# EAGLE board pcb1a (EAGLE 9.6.2)
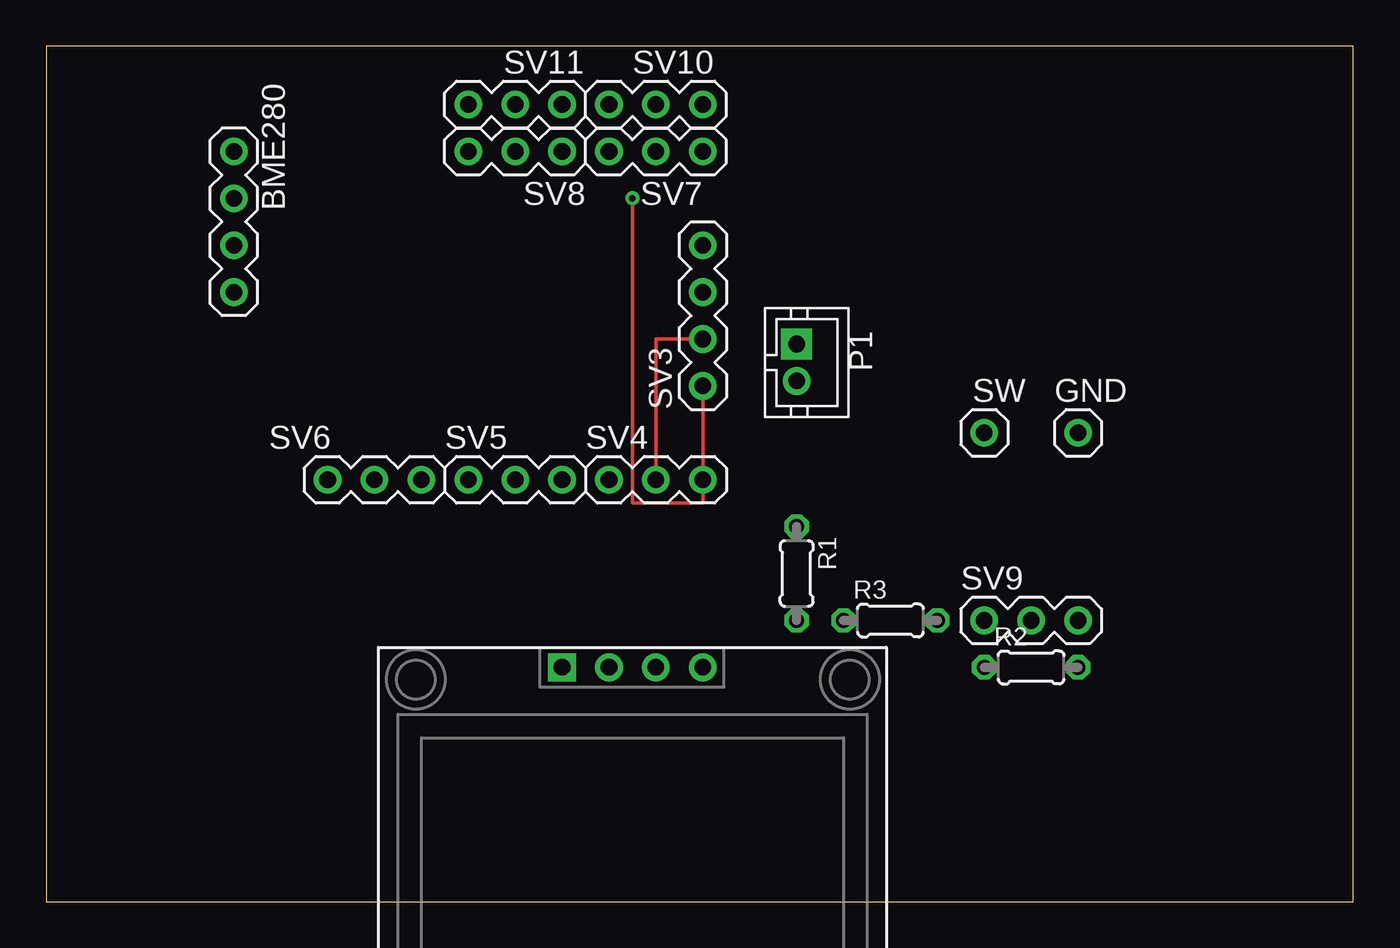
[diagram p0: board, top side]
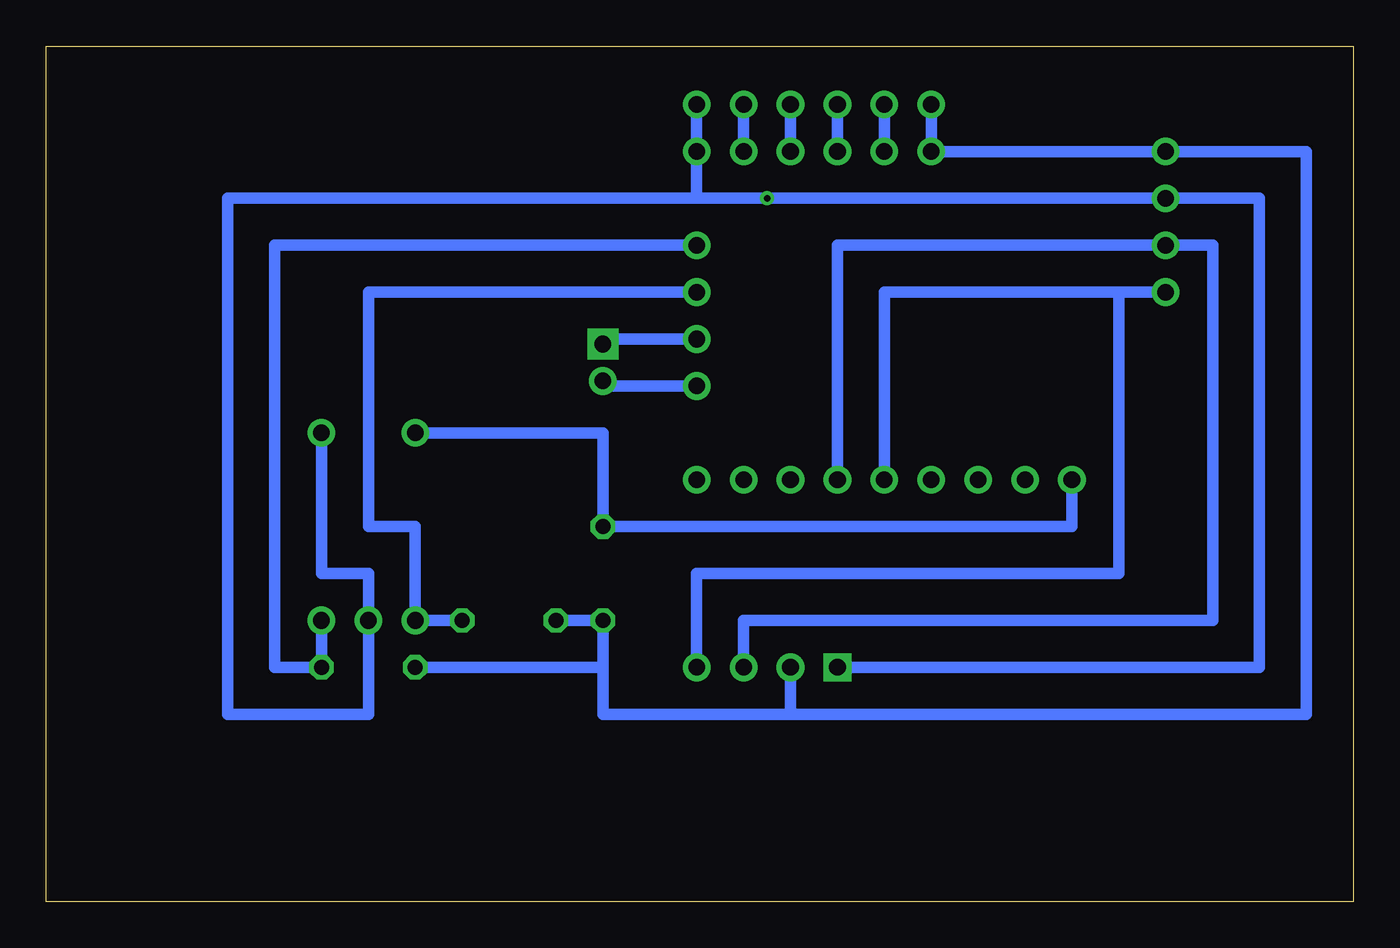
[diagram p1: board, bottom side, seen from below]

Size 70.79 x 46.34 mm. Coordinates in mm from the lower left corner, seen from the top.
Outline: 0,0 70.79,0 70.79,46.34 0,46.34 0,0
Copper layers (1*16): Top 0.035mm / dielectric 1.5mm / Bottom 0.035mm
Design rules "default": minimum track width 6mil, minimum drill 0.35mm, track to track 6mil, track to pad 6mil, pad to pad 6mil, via to via 6mil, smd to smd 6mil, copper to edge 40mil, drill to drill 6mil, minimum pad ring 10mil, minimum via ring 8mil, stop-mask expansion 4mil, vias tented up to drill 0mil, thermal gap 10mil

## Footprints (pad centres in the part's own frame; a part is rotated, then mirrored left to right if it is on the bottom)
PINHEAD-MA04-1 = drill 0.9 pad 1.5: 1 -3.81,0; 2 -1.27,0; 3 1.27,0; 4 3.81,0
PINHEAD-MA01-1 = drill 0.9 pad 1.5: 1 1.27,0
OLED-I2C-0.96 = drill 0.9 pad 1.5 square: GND -5.08,10.16 | drill 0.9 pad 1.5: SCL 0,10.16; SDA 2.54,10.16; VCC -2.54,10.16
JST-PH2 = drill 0.9 pad 1.676 square: 1 -1,0 | drill 0.9 pad 1.5: 2 1,0
0204/5 = drill 0.813 octagon: 1 -2.54,0; 2 2.54,0
PINHEAD-MA03-1 = drill 0.9 pad 1.5: 1 -1.27,0; 2 1.27,0; 3 3.81,0

## Placement (x,y rotation side)
BME280  [PINHEAD-MA04-1]  10.16,36.83 270 top
GND  [PINHEAD-MA01-1]  54.61,25.4 0 top
OLED1  OLED-SSD1306-0.96  [OLED-I2C-0.96]  33.02,2.54 0 top
P1  [JST-PH2]  40.64,29.21 270 top
R1  10K  [0204/5]  40.64,17.78 270 top
R2  10K  [0204/5]  53.34,12.7 0 top
R3  10K  [0204/5]  45.72,15.24 0 top
SV3  [PINHEAD-MA04-1]  35.56,31.75 90 top
SV4  [PINHEAD-MA03-1]  31.75,22.86 0 top
SV5  [PINHEAD-MA03-1]  24.13,22.86 0 top
SV6  [PINHEAD-MA03-1]  16.51,22.86 0 top
SV7  [PINHEAD-MA03-1]  34.29,40.64 180 top
SV8  [PINHEAD-MA03-1]  26.67,40.64 180 top
SV9  [PINHEAD-MA03-1]  52.07,15.24 0 top
SV10  [PINHEAD-MA03-1]  34.29,43.18 180 top
SV11  [PINHEAD-MA03-1]  26.67,43.18 180 top
SW  [PINHEAD-MA01-1]  49.53,25.4 0 top

## Library data of the parts
BME280 SV3-SV11 = ytani1; OC_FARNELL: unknown; OC_NEWARK: unknown
GND P1 SW = ytani1
OLED1 = ytani1; OC_AKIZUKI: P-12031; URL_AKIZUKI: https://akizukidenshi.com/catalog/g/gP-12031/
R1-R3 = rcl; SPICEPREFIX: R

## Nets
+3V3: BME280.1 OLED1.VCC R1.2 R2.1 R3.1 SV8.3 SV11.3
GND: BME280.2 GND.1 OLED1.GND P1.2 SV3.1 SV4.3 SV7.1 SV9.2 SV10.1
N$1: R3.2 SV3.3 SV9.1
N$2: BME280.3 OLED1.SCL SV5.3
N$3: BME280.4 OLED1.SDA SV5.2
N$4: SV7.2 SV10.2
N$5: P1.1 SV3.2 SV4.2
N$6: R2.2 SV3.4 SV9.3
N$7: SV7.3 SV10.3
N$8: SV8.1 SV11.1
N$9: SV8.2 SV11.2
N$10: R1.1 SV6.1 SW.1

## Tracks (layer width: path | path; a pad name or v marks a point on that pad's centre or on a via)
+3V3
  Bottom 0.61: SV11.3 SV8.3 BME280.1 2.54,40.64 2.54,10.16 30.48,10.16 | OLED1.VCC 30.48,10.16 | 30.48,10.16 40.64,10.16 40.64,12.7 | R2.1 40.64,12.7 | R3.1 R1.2 40.64,12.7
GND  (via drill 0.35)
  Top 0.2: SV3.1 SV4.3 35.56,21.59 31.75,21.59 v31.75,38.1
  Bottom 0.61: SV10.1 SV7.1 35.56,38.1 | GND.1 55.88,17.78 53.34,17.78 SV9.2 53.34,10.16 60.96,10.16 60.96,38.1 35.56,38.1 | OLED1.GND 5.08,12.7 5.08,38.1 BME280.2 v31.75,38.1 35.56,38.1 | P1.2 40.37,27.94 SV3.1
N$1
  Bottom 0.61: SV3.3 53.34,33.02 53.34,20.32 50.8,20.32 SV9.1 R3.2
N$2
  Bottom 0.61: SV5.3 27.94,35.56 BME280.3 7.62,35.56 7.62,15.24 33.02,15.24 OLED1.SCL
N$3
  Bottom 0.61: SV5.2 25.4,33.02 BME280.4 12.7,33.02 12.7,17.78 35.56,17.78 OLED1.SDA
N$4
  Bottom 0.61: SV7.2 SV10.2
N$5
  Top 0.2: SV4.2 33.02,30.48 SV3.2
  Bottom 0.61: SV3.2 40.37,30.48 P1.1
N$6
  Bottom 0.61: SV3.4 58.42,35.56 58.42,12.7 R2.2 SV9.3
N$7
  Bottom 0.61: SV7.3 SV10.3
N$8
  Bottom 0.61: SV8.1 SV11.1
N$9
  Bottom 0.61: SV8.2 SV11.2
N$10
  Bottom 0.61: SV6.1 15.24,20.32 R1.1 40.64,25.4 SW.1